# Altium PCB PCB.PcbDoc
Units mil, origin at the board's own origin, x right, y up, seen from the top; angles counter-clockwise.
Board outline 1880 x 2820 mil, 2 copper layers (Top Layer, Bottom Layer); 7 components, 15 nets, 70 pads, 0 vias.
Unrouted connection lines stored in the file: 5.
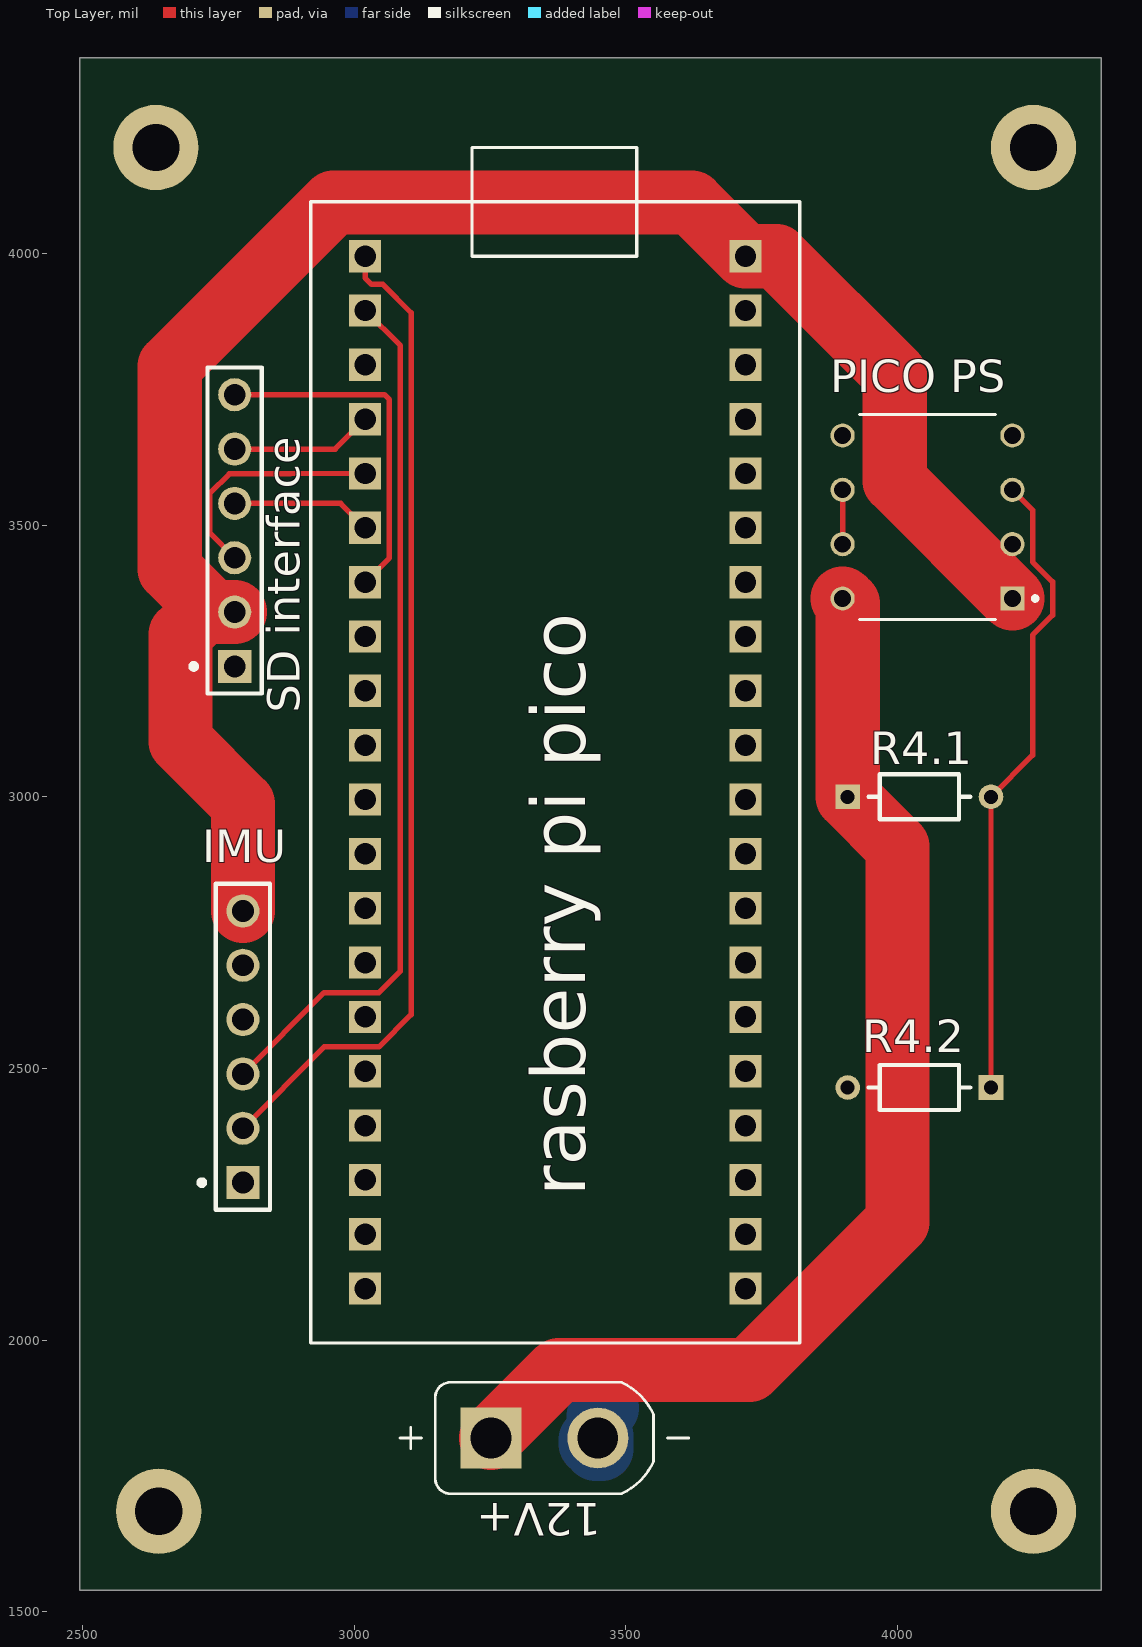
[diagram p0: Top Layer view]
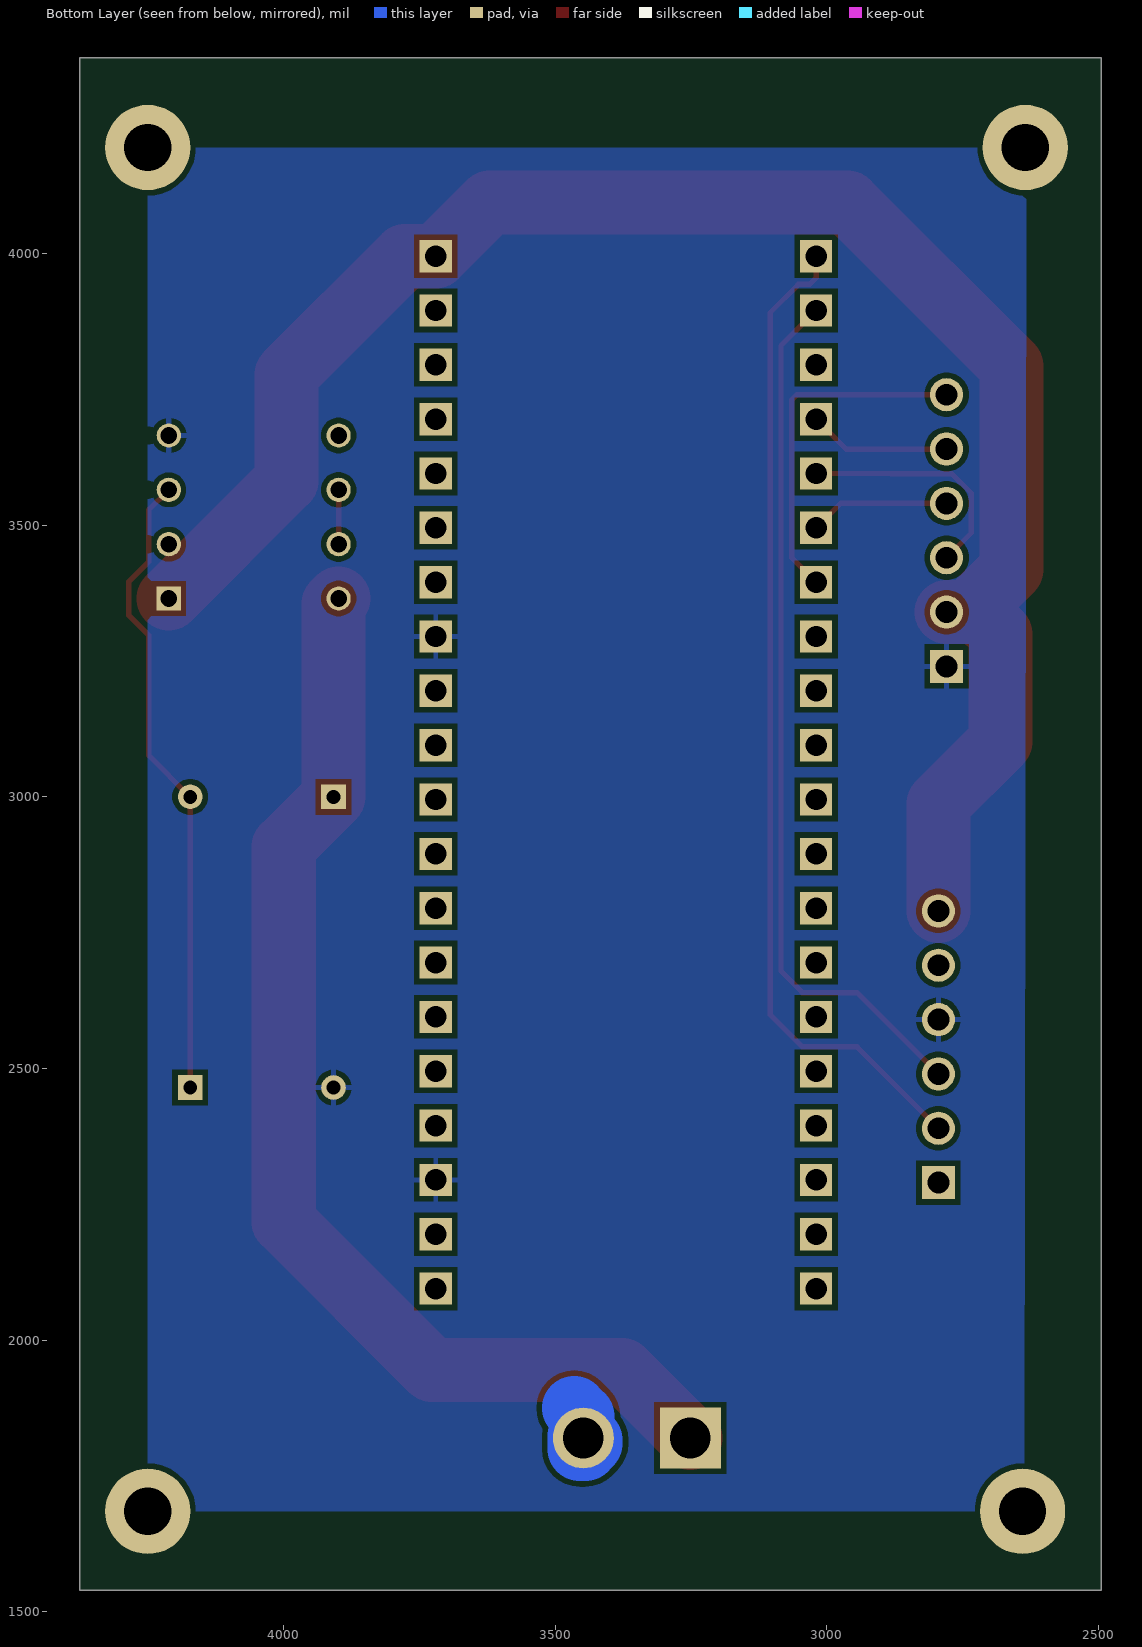
[diagram p1: Bottom Layer view, seen from below]
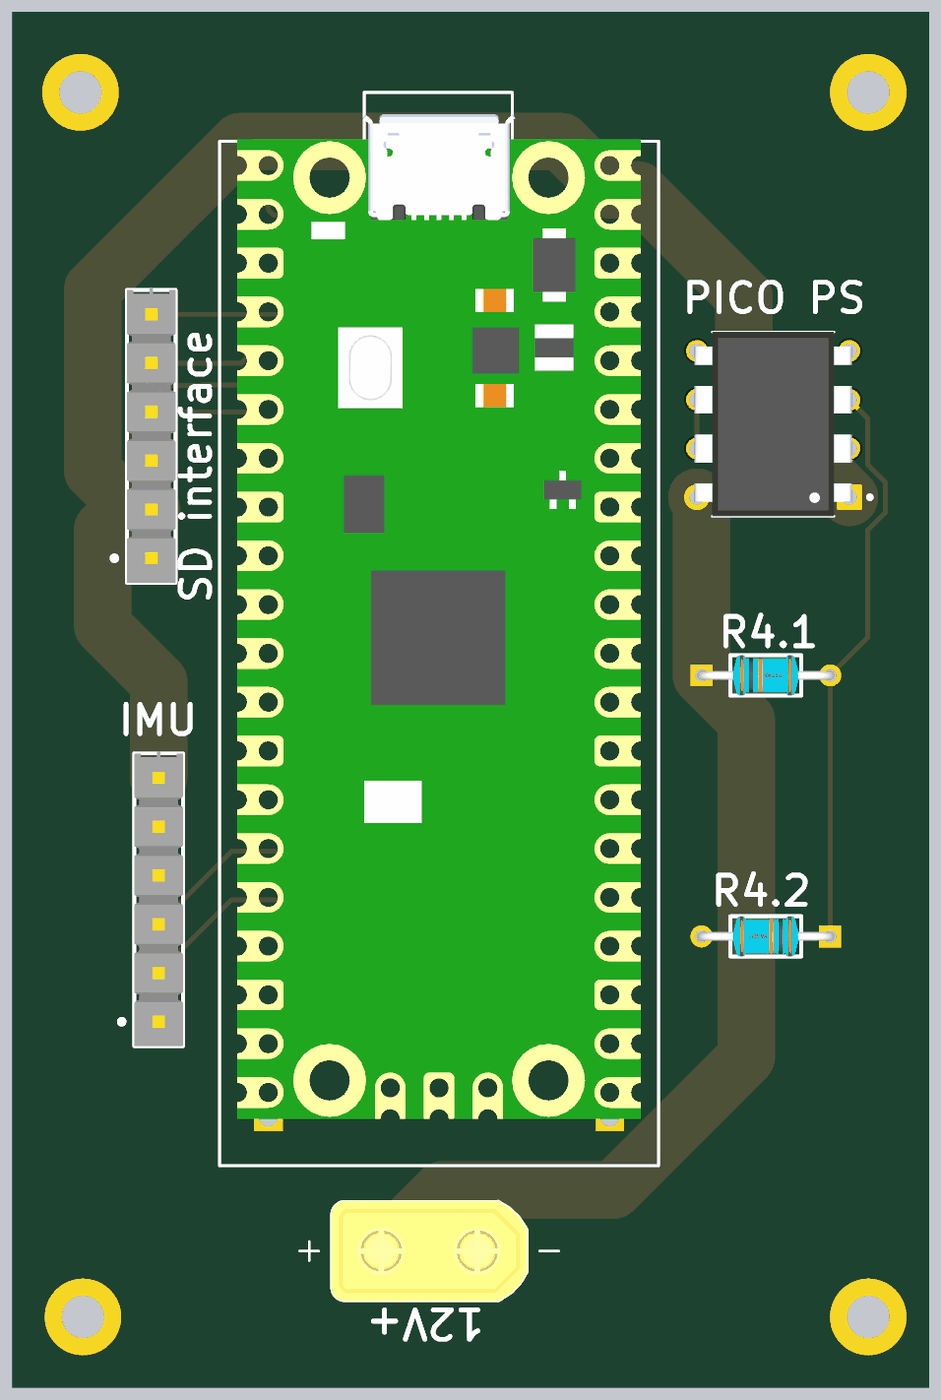
[diagram p2: 3D render of the assembled board from above, using the file's embedded part models]

## Layer stack, top to bottom
Top Solder: solder mask 0.4, Solder Resist, Dk 3.5
Top Layer: signal copper 1.4
Dielectric 1: dielectric 12.6, FR-4, Dk 4.8
Bottom Layer: signal copper 1.4
Bottom Solder: solder mask 0.4, Solder Resist, Dk 3.5

## Board outline
2495,1540 2495,4360 4375,4360 4375,1540

## Design rules (kind name [scope] priority, off if disabled: settings)
Clearance Clearance_1 [OnMid vs OnMid] p1: gap=10 ignorepadtopadclearanceinfootprint=FALSE sourcerule=43 cellrowname=All cellrowtype=0 cellcolname=All cellcoltype=0 innerlayers=TRUE
Clearance Clearance_2 [(ExistsOnLayer('Top Layer') Or ExistsOnLayer('Bottom Layer')) vs (ExistsOnLayer('Top Layer') Or ExistsOnLayer('Bottom Layer'))] p2: gap=10 ignorepadtopadclearanceinfootprint=FALSE sourcerule=43 cellrowname=All cellrowtype=0 cellcolname=All cellcoltype=0 outerlayers=TRUE
Clearance [All] p3: gap=10 ignorepadtopadclearanceinfootprint=FALSE ismatrix=TRUE
PolygonConnect [All] p1: connectstyle=Relief reliefconductorwidth=10 reliefentries=4 polygonreliefangle="90 Angle" airgapwidth=10
RoutingVias [All] p1: holewidth=28 width=50 viastyle="Through Hole" minholewidth=28 minwidth=50 maxholewidth=28 maxwidth=50
SolderMaskExpansion [All] p1: expansion=0 istentingtop=FALSE
SupplyNets "Schematic Supply Nets_3" [InNet('GND')] p1: voltage=0.000
SupplyNets "Schematic Supply Nets_2" [InNet('12V+')] p2: voltage=0.000
SupplyNets "Schematic Supply Nets_1" [InNet('5V+')] p3: voltage=0.000
SupplyNets "Schematic Supply Nets" [InNet('3.3V+')] p4: voltage=0.000
Width "Schematic Width Constraint_2" [InNetClass('Power')] p1: maxlimit=118.11 minlimit=78.74 preferedwidth=118.11 minimp=50.000000 maximp=50.000000 favimp=50.000000
Width "Schematic Width Constraint_1" [InNet('12V+')] p2: maxlimit=118.11 minlimit=78.74 preferedwidth=118.11 minimp=50.000000 maximp=50.000000 favimp=50.000000
Width "Schematic Width Constraint" [InNet('NetD1_2')] p3: maxlimit=118.11 minlimit=78.74 preferedwidth=118.11 minimp=50.000000 maximp=50.000000 favimp=50.000000
Width [All] p4: maxlimit=10 minlimit=10 preferedwidth=10
30 further rules are at their usual default settings.

## Classes and differential pairs
net class Power: 3.3V+ 5V+ 12V+ GND
component class SD_Card: "SD interface"
component class Pico: "Pico Op AMP" "PICO PS" R4.1 R4.2
component class IMU: IMU
component class EngineLines: S1 S2
component class Batteries: 12V+

## Components (designator, comment, footprint, x,y, rotation, side; value= is the part's Value field where it differs from the comment)
12V+ "Baattery" AMASS_XT30UPB-M 3350,1820 r0 top
IMU "TSW-106-07-S-S" SMTC-TSW-106-07-S-S_V 2795,2540 r90 top
"PICO PS" "TLV2372" DIP794W45P254L959H508Q8 4055,3515 r180 top
R4.1 "35K" FP-MFR-12-MFG 4040,3000 r0 top
R4.2 "25K" FP-MFR-12-MFG 4040,2465 r180 top
"Rasberry Pi Pico" "" RASPBERRY_PI_PICO 3370,3095 r0 top
"SD interface" "SD Card" SMTC-TSW-106-07-S-S_V 2780,3490 r90 top

## Footprints (in the part's own frame and the unit in brackets; to place one, negate y for a bottom-side part, rotate by r counter-clockwise, add the part's x,y. Pads: shape width x height; smd on the part's side, far side on the other; paste and mask are expansions set on the pad)
AMASS_XT30UPB-M [mm]
  round 2.85 hole 1.9 mask+0.102: N(2.5,0)
  rect 2.85x2.85 / inner round 2.85 / far side rect 2.85x2.85 hole 1.9 mask+0.102: P(-2.5,0)
  silkscreen extent -6.75,-2.61 6.75,2.61, body extent -5.1,-2.6 5.1,2.6, height 10.7
DIP794W45P254L959H508Q8 [mm]
  rect 1.13x1.13 / inner round 1.13 / far side rect 1.13x1.13 hole 0.78 mask+0.102: 1(-3.97,3.81)
  round 1.13 hole 0.78 mask+0.102: 2(-3.97,1.27) 3(-3.97,-1.27) 4(-3.97,-3.81) 5(3.97,-3.81) 6(3.97,-1.27) 7(3.97,1.27) 8(3.97,3.81)
  silkscreen extent -5.13,-4.79 3.18,4.79, body extent -4.1,-4.79 4.1,4.79, height 5.08
FP-MFR-12-MFG [mm]
  rect 1.15x1.15 hole 0.65 paste-2539.97 mask+0: 1(-3.35,0)
  round 1.15 hole 0.65 paste-2539.97 mask+0: 2(3.35,0)
  silkscreen extent -2.37,-1.05 2.37,1.05, body extent -4.03,-1.15 4.03,1.15, height 0.25
RASPBERRY_PI_PICO [mm]
  rect 1.508x1.508 / inner round 1.508 / far side rect 1.508x1.508 hole 1: 3V3(8.89,12.7) 3V3_EN(8.89,15.24) ADC_VREF(8.89,10.16) AGND(8.89,5.08) GND(8.89,17.78) GND2(8.89,-7.62) GND3(8.89,-20.32) GND4(-8.89,17.78) GND5(-8.89,5.08) GND6(-8.89,-7.62) GND7(-8.89,-20.32) GP0(-8.89,22.86) GP1(-8.89,20.32) GP2(-8.89,15.24) GP3(-8.89,12.7) GP4(-8.89,10.16) GP5(-8.89,7.62) GP6(-8.89,2.54) GP7(-8.89,0) GP8(-8.89,-2.54) GP9(-8.89,-5.08) GP10(-8.89,-10.16) GP11(-8.89,-12.7) GP12(-8.89,-15.24) GP13(-8.89,-17.78) GP14(-8.89,-22.86) GP15(-8.89,-25.4) GP16(8.89,-25.4) GP17(8.89,-22.86) GP18(8.89,-17.78) GP19(8.89,-15.24) GP20(8.89,-12.7) GP21(8.89,-10.16) GP22(8.89,-5.08) GP26_A0(8.89,0) GP27_A1(8.89,2.54) GP28_A2(8.89,7.62) RUN(8.89,-2.54) VBUS(8.89,22.86) VSYS(8.89,20.32)
  silkscreen extent -11.43,-27.94 11.43,27.94, body extent -10.5,-25.5 10.5,26.8, height 3.73
SMTC-TSW-106-07-S-S_V [mm] "Header, 6-Leads, Body 15.24x2.54mm, Pitch 2.54mm"
  rect 1.55x1.55 hole 1.02: 1(-6.35,0)
  round 1.55 hole 1.02: 2(-3.81,0) 3(-1.27,0) 4(1.27,0) 5(3.81,0) 6(6.35,0)
  silkscreen extent -7.62,-1.27 7.62,2.04, body extent -7.62,-1.27 7.75,1.27, height 8.38

## Part data
12V+: library part XT30UPB-M, "Socket; DC supply; XT30; male; PIN: 2; on PCBs; THT; yellow; 15A; 500V", Package=None, Check_prices=https://www.snapeda.com/parts/XT30UPB-M/AMASS/view-part/?ref=eda, MF=amass, MP=XT30UPB-M, SnapEDA_Link=https://www.snapeda.com/parts/XT30UPB-M/AMASS/view-part/?ref=snap
IMU "SD interface": library part CMP-1681-00007-2, "Male Header, Pitch 2.54 mm, 1 x 6 Position, Height 8.38 mm, Tail Length 2.54 mm, -55 to 125 degC, RoHS, Bulk", Colour=Black, Manufacturer=Samtec, Max Operating Temperature="125 degC", Min Operating Temperature="-55 degC", Package Quantity=1, ComponentLink1Description="Manufacturer URL", ComponentLink1URL=http://www.samtec.com/, ComponentLink2Description=Datasheet, ComponentLink2URL=http://suddendocs.samtec.com/catalog_english/tsw_th.pdf, ComponentLink3Description="Package Specification", ComponentLink3URL=http://suddendocs.samtec.com/prints/tsw-xxx-xx-x-x-xx-xxx-footprint.pdf, Contact Finish=Gold, Contact Material=Bronze, Contact Plating=Gold, DatasheetVersion=12/2015, Height="8.38 mm", Lead Pitch="0.1 inch", Length="15.24 mm", Mount="Through Hole", Mounting Technology="Through Hole", PackageDescription="Male Header, Pitch 2.54 mm, 1 x 6 Position, Height 8.38 mm, Tail Length 2.54 mm", PackageReference=TSW-102-07-S-S, Packaging=Bulk, Pins=6, RoHSCompliant=true, Rows=1
"PICO PS": library part TLV2372IP, "Dual, 16-V, 3-MHz, RRIO operational amplifier", Package="PDIP-8 Texas", Check_prices=https://www.snapeda.com/parts/TLV2372IP/Texas+Instruments/view-part/?ref=eda, MF="Texas Instruments", MP=TLV2372IP, SnapEDA_Link=https://www.snapeda.com/parts/TLV2372IP/Texas+Instruments/view-part/?ref=snap
R4.1 R4.2: library part CMP-03413-000012-1, "RES MF 1/6W 1% AXIAL", Max Operating Temperature=155°C, Min Operating Temperature=-55°C, Power Rating=160mW, Resistance=10kR, Tolerance=1%, Voltage Rating=200V, Packaging="Ammo Pack", Termination=Axial, Voltage Rating (DC)=200V
"Rasberry Pi Pico": library part RASPBERRY_PI_PICO, "Raspberry Pi Board, Arm Cortex-M0+; Core Architecture:Arm; Core Sub-Architecture:Cortex-M0+; Kit Contents:Raspberry Pi Pico Board; No. Of Bits:32Bit; Silicon Core Number:Rp2040; Silicon Manufacturer:Raspberry Pi", Package=None, Check_prices=https://www.snapeda.com/parts/RASPBERRY%20PI%20PICO/Raspberry+Pi/view-part/?ref=eda, MF="Raspberry Pi", MP="RASPBERRY PI PICO", SnapEDA_Link=https://www.snapeda.com/parts/RASPBERRY%20PI%20PICO/Raspberry+Pi/view-part/?ref=snap

## Free pads (board coordinates)
  round 157 hole 87: 3(2635,4195) 3(2640,1685) 3(4250,1685) 3(4250,4195)

## Nets (pads, with @x,y where several pads share a name; then routed paths per layer and width w, separated by ;. In a path a pad name is that pad's centre, name@x,y a point inside that pad or via, vN(x,y) a via of type N, cw(c..) or ccw(c..) an arc to the next point about the centre after c; other vN are vias at no path point)
3.3V+: "Rasberry Pi Pico.3V3"
5V+: "PICO PS.1" "PICO PS.2" "Rasberry Pi Pico.VBUS" "SD interface.2" IMU.6 | length 3291.1
  Top Layer w118.11: IMU.6 2795,2987.27 2680.43,3101.84 2680.43,3299.12 2721.32,3340 2780,3340 2779.57,3340.43 2738.76,3340.43 2660.43,3418.76 2660.43,3792.46 2961.71,4093.74 3621.26,4093.74 3720,3995 3777.03,3995 3994.79,3777.23 3994.79,3581.51 4211.3,3365
12V+: 12V+.P "PICO PS.8" R4.1.1 | length 2102.1
  Top Layer w118.11: 12V+.P 3376.73,1945.16 3727.19,1945.16 3999.8,2217.77 3999.8,2908.31 R4.1.1 3908.11,3355.59 3898.7,3365
GND: 12V+.N "PICO PS.4" "Rasberry Pi Pico.AGND" "Rasberry Pi Pico.GND3" "SD interface.1" IMU.4 pad.3 R4.2.2 | length 134.3
  Bottom Layer w118.11: 12V+.N 3453.43,1825 3455,1823.43 3455,1800 3445,1800 3435,1810 3435,1816.57 3450,1831.57 3450,1860 3465,1875
NetIMU_1: IMU.1
NetIMU_2: "Rasberry Pi Pico.GP0" IMU.2 | length 1839.3
  Top Layer w10: IMU.2 2944.69,2539.69 3045.27,2539.69 3104.69,2599.1 3104.69,3890.9 3052.63,3942.95 3032.05,3942.95 3020,3955 3020,3995
NetIMU_3: "Rasberry Pi Pico.GP1" IMU.3 | length 1610.7
  Top Layer w10: IMU.3 2944.69,2639.69 3045.27,2639.69 3084.69,2679.1 3084.69,3830.31 3020,3895
"NetPICO PS_3": "PICO PS.3" R4.1.2 R4.2.1 | length 1177.7
  Top Layer w10: R4.2.1 R4.1.2 4248.54,3076.65 4248.54,3297.51 4285.35,3334.33 4285.35,3395.67 4248.54,3432.49 4248.54,3527.76 4211.3,3565
"NetPICO PS_6": "PICO PS.6" "PICO PS.7" | length 100
  Top Layer w10: 3898.7,3465 3898.7,3565
"NetRasberry Pi Pico_GP2": "Rasberry Pi Pico.GP2" "SD interface.5" | length 262.8
  Top Layer w10: 2780,3640 2965,3640 3020,3695
"NetRasberry Pi Pico_GP3": "Rasberry Pi Pico.GP3" "SD interface.3" | length 438.2
  Top Layer w10: 2780,3440 2734.49,3485.51 2734.49,3558.85 2770.12,3594.49 2882.46,3594.49 2882.98,3595 3020,3595
"NetRasberry Pi Pico_GP4": "Rasberry Pi Pico.GP4" "SD interface.4" | length 258.6
  Top Layer w10: 2780,3540 2975,3540 3020,3495
"NetRasberry Pi Pico_GP5": "Rasberry Pi Pico.GP5" "SD interface.6" | length 642.9
  Top Layer w10: 2780,3740 3055.58,3740 3064.69,3730.9 3064.69,3439.69 3020,3395
NetS1_1: 
NetS1_2: 
pads on no net: "PICO PS.5" "Rasberry Pi Pico.3V3_EN" "Rasberry Pi Pico.ADC_VREF" "Rasberry Pi Pico.GND2" "Rasberry Pi Pico.GND4" "Rasberry Pi Pico.GND5" "Rasberry Pi Pico.GND6" "Rasberry Pi Pico.GND7" "Rasberry Pi Pico.GND" "Rasberry Pi Pico.GP6" "Rasberry Pi Pico.GP7" "Rasberry Pi Pico.GP8" "Rasberry Pi Pico.GP9" "Rasberry Pi Pico.GP10" "Rasberry Pi Pico.GP11" "Rasberry Pi Pico.GP12" "Rasberry Pi Pico.GP13" "Rasberry Pi Pico.GP14" "Rasberry Pi Pico.GP15" "Rasberry Pi Pico.GP16" "Rasberry Pi Pico.GP17" "Rasberry Pi Pico.GP18" "Rasberry Pi Pico.GP19" "Rasberry Pi Pico.GP20" "Rasberry Pi Pico.GP21" "Rasberry Pi Pico.GP22" "Rasberry Pi Pico.GP26_A0" "Rasberry Pi Pico.GP27_A1" "Rasberry Pi Pico.GP28_A2" "Rasberry Pi Pico.RUN" "Rasberry Pi Pico.VSYS" IMU.5

## Polygon pours and split planes (outlines as drawn)
GND on Bottom Layer "GND_L02_P000" (solid, remove dead copper, pour order 0): 2633.23,4195 4250,4195 4250,1690 4254.63,1685.37 2636.67,1685.37

## Silkscreen, mask and mechanical layers (free items; w line width, h text height)
Mechanical 1:
  the board outline again, w10

## Text inside footprints (layer, text, board x,y; h text height)
"Rasberry Pi Pico": Top Overlay "rasberry pi pico" at 3425,2265 h100 r90